# EAGLE board amp_test_filter_route_4 (EAGLE 7.6.0)
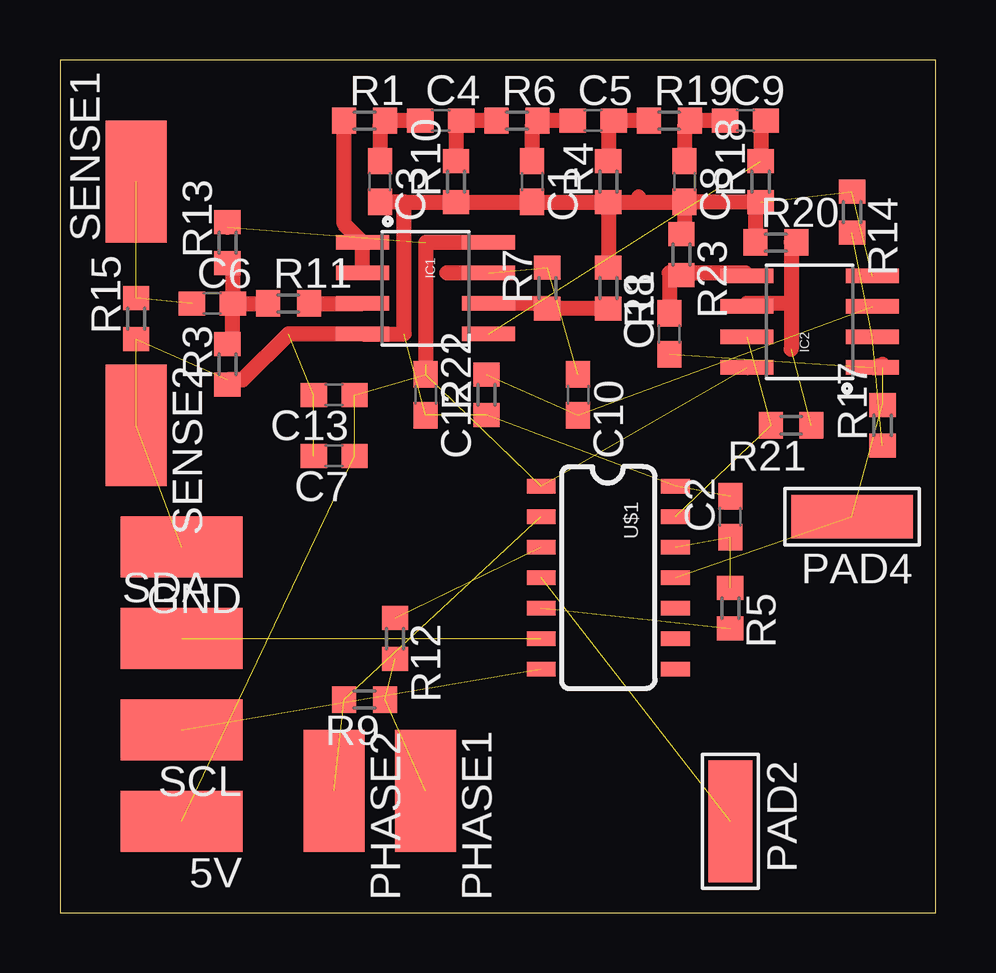
[diagram p0: board, top side]

Size 36.5 x 35.55 mm. Coordinates in mm from the lower left corner, seen from the top.
Outline: 0,0 36.5,0 36.5,35.55 0,35.55 0,0
Copper layers (1*16): Top 0.035mm / dielectric 1.5mm / Bottom 0.035mm
Design rules "default *": minimum track width 10mil, minimum drill 24mil, track to track 8mil, track to pad 8mil, pad to pad 8mil, via to via 8mil, smd to smd 8mil, copper to edge 40mil, drill to drill 8mil, minimum pad ring 10mil, minimum via ring 8mil, stop-mask expansion 4mil, vias tented up to drill 0mil, thermal gap 10mil
Net classes: 0 default: width 0.635 mm, drill 0.66 mm

## Footprints (pad centres in the part's own frame; a part is rotated, then mirrored left to right if it is on the bottom)
SMD2,54-5,08 = smd 2.54 x 5.08: 1 0,0
C0603 = smd 1.1 x 1: 1 -0.85,0; 2 0.85,0
SO08 = smd 0.61 x 2.21: 1 -1.905,-2.616; 2 -0.635,-2.616; 3 0.635,-2.616; 4 1.905,-2.616; 5 1.905,2.616; 6 0.635,2.616; 7 -0.635,2.616; 8 -1.905,2.616
5-1,8 = smd 1.829 x 5.08: 1 0,0
R0603 = smd 1 x 1.1: 1 -0.85,0; 2 0.85,0
SO14 = smd 0.6 x 1.2: 1 -3.81,-2.8; 2 -2.54,-2.8; 3 -1.27,-2.8; 4 0,-2.8; 5 1.27,-2.8; 6 2.54,-2.8; 7 3.81,-2.8; 8 3.81,2.8; 9 2.54,2.8; 10 1.27,2.8; 11 0,2.8; 12 -1.27,2.8; 13 -2.54,2.8; 14 -3.81,2.8

## Placement (x,y rotation side)
5V  [SMD2,54-5,08]  5.08,3.81 90 top
C1  0.0022uf  [C0603]  19.68,30.48 270 top
C2  10uf  [C0603]  27.94,16.51 90 top
C3  0.0022uf  [C0603]  13.34,30.48 270 top
C4  0.01 uf  [C0603]  15.88,33.02 0 top
C5  0.01 uf  [C0603]  22.23,33.02 0 top
C6  0.1uf  [C0603]  6.35,25.4 0 top
C7  0.1uf  [C0603]  11.43,19.05 180 top
C8  0.0022uf  [C0603]  26.04,30.48 270 top
C9  0.01 uf  [C0603]  28.58,33.02 0 top
C10  0.1uf  [C0603]  21.59,21.59 270 top
C11  0.1uf  [C0603]  25.4,24.13 90 top
C12  0.1uf  [C0603]  15.24,21.59 270 top
C13  10uf  [C0603]  11.43,21.59 180 top
GND  [SMD2,54-5,08]  5.08,15.24 90 top
IC1  LMV358SOIC  [SO08]  15.24,26.03 270 top
IC2  LMV358SOIC  [SO08]  31.24,24.64 90 top
PAD2  WIREPADSMD5-1,8  [5-1,8]  27.94,3.81 180 top
PAD4  WIREPADSMD5-1,8  [5-1,8]  33.02,16.51 90 top
PHASE1  [SMD2,54-5,08]  15.24,5.08 180 top
PHASE2  [SMD2,54-5,08]  11.43,5.08 180 top
R1  1k  [R0603]  12.7,33.02 0 top
R3  1M  [R0603]  6.98,22.86 90 top
R4  1k  [R0603]  22.86,30.48 90 top
R5  10k  [R0603]  27.94,12.7 270 top
R6  1k  [R0603]  19.05,33.02 0 top
R7  100k  [R0603]  20.32,26.03 90 top
R8  1k  [R0603]  22.86,26.03 270 top
R9  1k  [R0603]  12.7,8.89 180 top
R10  1k  [R0603]  16.51,30.48 90 top
R11  1k  [R0603]  9.52,25.4 0 top
R12  50  [R0603]  13.97,11.43 270 top
R13  1M  [R0603]  6.98,27.94 90 top
R14  1k  [R0603]  33.02,29.21 270 top
R15  1M  [R0603]  3.18,24.77 90 top
R17  100k  [R0603]  34.29,20.32 90 top
R18  1k  [R0603]  29.21,30.48 90 top
R19  1k  [R0603]  25.4,33.02 0 top
R20  1k  [R0603]  29.84,27.94 0 top
R21  25k  [R0603]  30.48,20.32 180 top
R22  25k  [R0603]  17.78,21.59 90 top
R23  25k  [R0603]  25.91,27.43 270 top
SCL  [SMD2,54-5,08]  5.08,7.62 90 top
SDA  [SMD2,54-5,08]  5.08,11.43 270 top
SENSE1  [SMD2,54-5,08]  3.18,30.48 0 top
SENSE2  [SMD2,54-5,08]  3.18,20.32 180 top
U$1  ATTINY84  [SO14]  22.86,13.97 270 top

## Library data of the parts
5V GND PAD2 PAD4 PHASE1 PHASE2 SCL SDA SENSE1 SENSE2 = wirepad
C1-C13 R1 R3-R15 R17-R23 = rcl
IC1 IC2 = SparkFun-AnalogIC; PROD_ID: IC-09657
U$1 = SparkFun-DigitalIC; PROD_ID: IC-11285

## Nets
5V: 5V.1 C7.1 C12.1 C13.1 IC1.8 IC2.8 R13.2 U$1.1
COMP_THRESH: C2.1 R5.1 U$1.12
GND: C1.2 C2.2 C3.2 C7.2 C8.2 C12.2 C13.2 GND.1 IC1.4 IC2.4 R3.1 R4.1 R8.1 R10.1 R14.1 R15.1 R18.1 R20.1 R22.1 R23.1 SENSE2.1 U$1.14
N$1: C10.2 IC2.3 R22.2
N$2: PHASE1.1 R9.1 R12.2
N$3: PHASE2.1 R9.2 U$1.2
N$4: R5.2 U$1.5
N$5: C6.1 R15.2 SENSE1.1
N$6: C4.2 R6.1 R10.2
N$7: C6.2 R3.2 R11.1 R13.1
N$8: IC1.3 R11.2
N$9: C1.1 C5.1 R6.2
N$10: PAD2.1 U$1.4
N$11: C3.1 C4.1 R1.2
N$12: R12.1 U$1.3
N$13: C11.2 IC2.5 R23.2
N$14: C5.2 R4.2 R19.1
N$15: IC1.6 R7.1 R8.2
N$16: IC2.2 R14.2 R17.1
N$17: C9.2 IC1.5 R18.2
N$18: C8.1 C9.1 R19.2
N$19: SDA.1 U$1.6
N$20: SCL.1 U$1.7
N$21: IC2.6 R20.2 R21.1
S1_OUT: IC1.1 IC1.2 R1.1
S2_OUT: C10.1 IC1.7 R7.2
S3_OUT: C11.1 IC2.1 PAD4.1 R17.2 U$1.11
S4_OUT: IC2.7 R21.2 U$1.13

## Tracks (layer width: path | path; a pad name or v marks a point on that pad's centre or on a via)
5V  (7 unrouted)
  Top 0.635: 15.24,22.86 15.24,27.94 IC1.8 | 6.98,28.57 R13.2 | IC2.8 28.7,22.73
COMP_THRESH  (2 unrouted)
GND  (11 unrouted)
  Top 0.635: 14.35,29.63 R10.1 C1.2 R4.1 | R4.1 24.13,29.63 | 24.13,29.63 C8.2 | C8.2 R18.1 28.99,29.63 R20.1 | 14.35,29.63 14.35,24.13 IC1.4 9.52,24.13 7.62,22.23 6.98,22.23 R3.1 | 14.35,29.63 C3.2 | R4.1 R8.1 | C8.2 26.04,28.57 R23.1 | 24.13,29.84 24.13,29.63
N$1  (2 unrouted)
N$2  (2 unrouted)
N$3  (2 unrouted)
N$4  (1 unrouted)
N$5  (2 unrouted)
N$6
  Top 0.635: R6.1 C4.2 16.51,32.8 R10.2
N$7
  Top 0.635: R13.1 7.2,27.09 C6.2 | C6.2 R11.1 | R3.2 7.2,23.71 C6.2
N$8
  Top 0.635: R11.2 IC1.3
N$9
  Top 0.635: C5.1 R6.2 19.68,32.8 C1.1
N$10  (1 unrouted)
N$11
  Top 0.635: C3.1 13.34,32.8 R1.2 C4.1
N$12  (1 unrouted)
N$13
  Top 0.635: C11.2 25.4,26.67 R23.2 26.04,26.67 28.58,26.67 IC2.5
N$14
  Top 0.635: R19.1 C5.2 22.86,32.8 R4.2
N$15
  Top 0.635: IC1.6 20.32,25.4 R7.1 R8.2
N$16  (2 unrouted)
N$17  (1 unrouted)
  Top 0.635: C9.2 29.21,33.02 R18.2
N$18
  Top 0.635: C9.1 R19.2 26.04,32.8 C8.1
N$19  (1 unrouted)
N$20  (1 unrouted)
N$21  (1 unrouted)
  Top 0.635: R20.2 30.48,27.94 30.48,25.4 | 30.48,25.4 28.63,25.4 IC2.6 | 30.48,25.4 30.48,23.49
S1_OUT
  Top 0.635: IC1.2 IC1.1 11.85,28.71 R1.1
S2_OUT  (2 unrouted)
  Top 0.635: IC1.7 16.13,26.67
S3_OUT  (4 unrouted)
  Top 0.635: 34.29,22.86 IC2.1 34.29,22.73
S4_OUT  (2 unrouted)